# Altium PCB breath_led.PcbDoc
Units mil, origin at the board's own origin, x right, y up, seen from the top; angles counter-clockwise.
Board outline 1574.8 x 787.4 mil, 2 copper layers (Top Layer, Bottom Layer); 17 components, 25 nets, 73 pads, 11 vias.
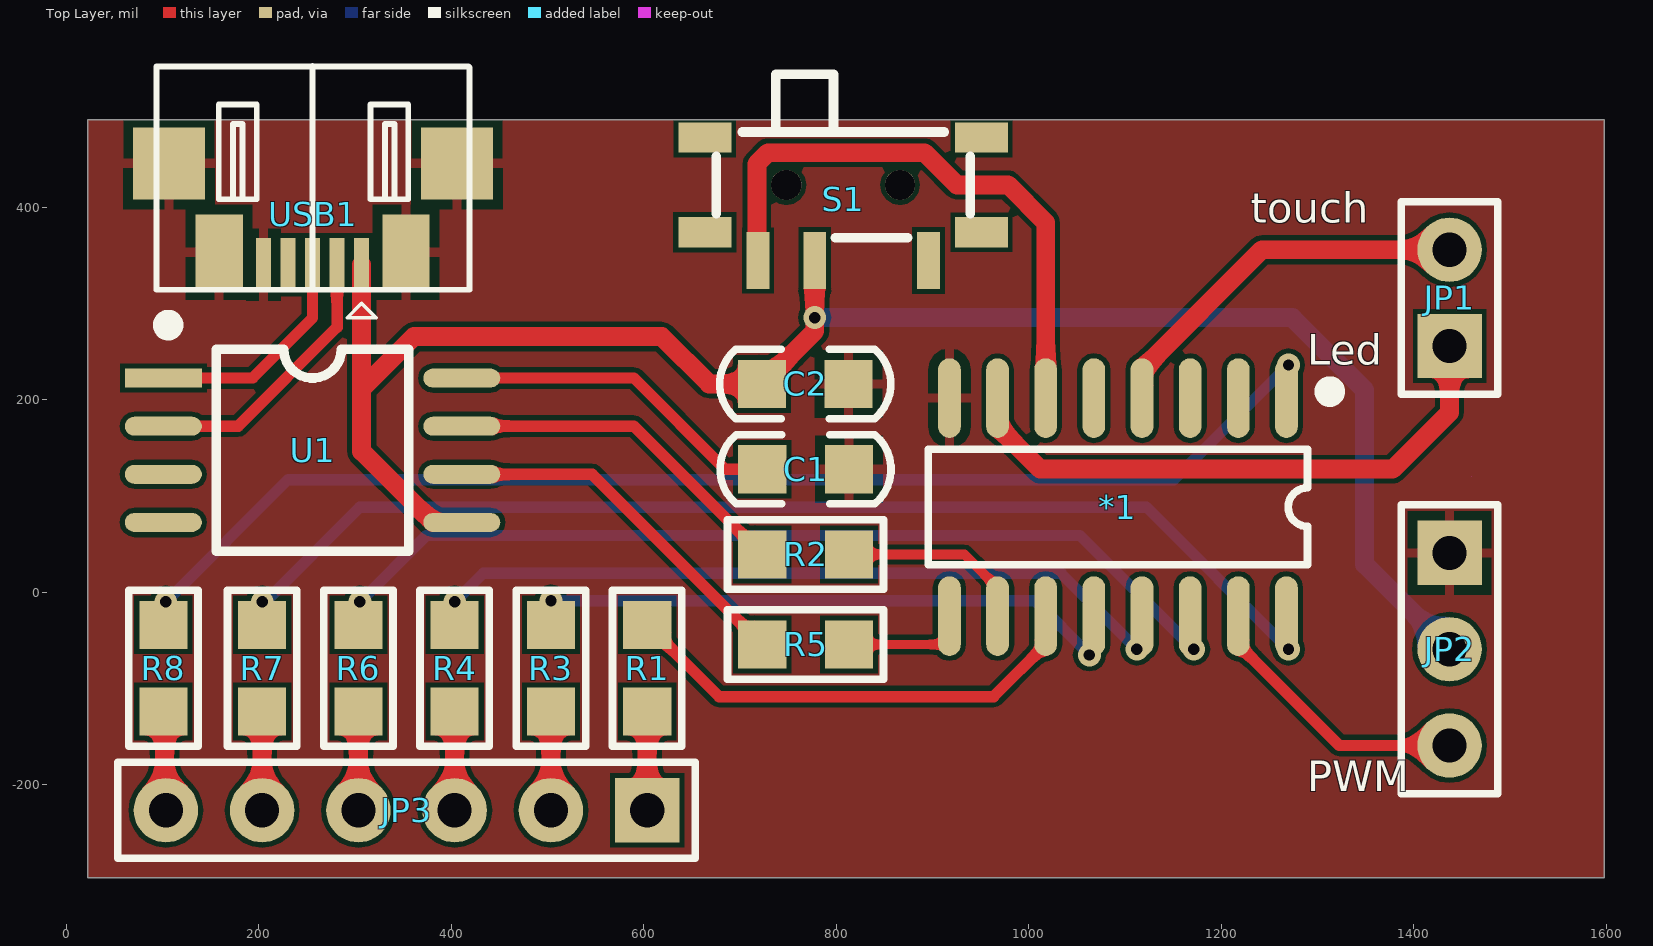
[diagram p0: Top Layer view]
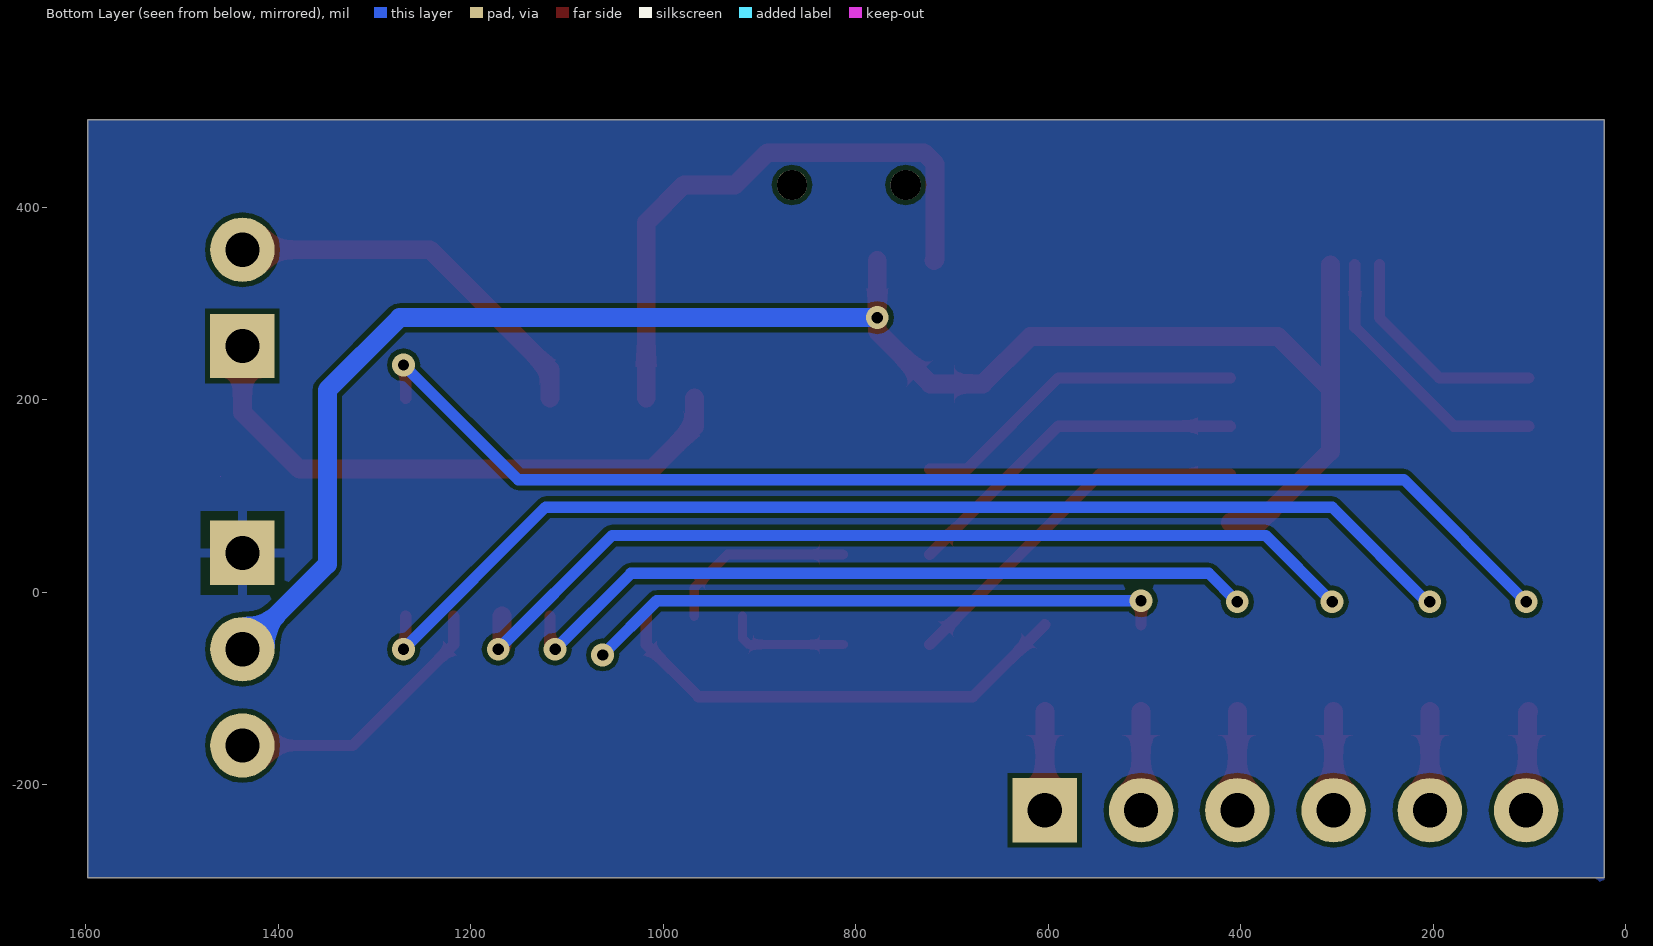
[diagram p1: Bottom Layer view, seen from below]

## Layer stack, top to bottom
Top Solder: solder mask 0.4, Solder Resist, Dk 3.5
Top Layer: signal copper 1.4
Dielectric 1: dielectric 12.6, FR-4, Dk 4.8
Bottom Layer: signal copper 1.4
Bottom Solder: solder mask 0.4, Solder Resist, Dk 3.5

## Board outline
22.64,-296.26 1597.44,-296.26 1597.44,491.14 22.64,491.14
cut-out: 1460,120

## Design rules (kind name [scope] priority, off if disabled: settings)
Clearance [All] p1: gap=5 ignorepadtopadclearanceinfootprint=FALSE except(0: Arc-Hole Track-Hole SMDPad-Hole THPad-Hole Via-Hole Fill-Hole Poly-Hole Region-Hole Text-Hole; 1: Text-Text; 7.87: Arc-Arc Arc-Track Track-Track)
HoleToHoleClearance [All] p1: gap=1 allowstackedmicrovias=TRUE
MinimumSolderMaskSliver [All] p1: minsoldermaskwidth=1
PolygonConnect [All] p1: connectstyle=Relief reliefconductorwidth=10 reliefentries=4 polygonreliefangle="90 Angle" airgapwidth=10
RoutingVias [All] p1: holewidth=11.81 width=23.62 viastyle="Through Hole" minholewidth=11.81 minwidth=23.62 maxholewidth=11.81 maxwidth=23.62
SilkToSilkClearance [All] p1: silktosilkclearance=0
SilkToSolderMaskClearance [IsPad] p1: minsilkscreentomaskgap=0 clearancetoexposedcopper=TRUE
SolderMaskExpansion [All] p1: expansion=4
Width [All] p1: maxlimit=393.7 minlimit=3.94 preferedwidth=9.65 bottomlayer_prefwidth=7.87 minimp=50.000000 maximp=50.000000 favimp=50.000000
26 further rules are at their usual default settings.

## Components (designator, comment, footprint, x,y, rotation, side; value= is the part's Value field where it differs from the comment)
*1 "STC15W408AS-SOP16" SOP16_M 1092.52,88.58 r270 top
C1 "104" "C 0805" 768.03,127.95 r0 top
C2 "104" "C 0805" 767.72,216.54 r180 top
JP1 "HDR-1X2" HDR-1X2 1437.01,255.91 r90 top
JP2 "HDR-1X3" HDR-1X3 1437.01,40.94 r270 top
JP3 "HDR-1X6" HDR-1X6 603.54,-226.38 r180 top
R1 "1K" "R 0805" 603.54,-78.74 r270 top
R2 "100R" "R 0805" 768.03,39.37 r0 top
R3 "1K" "R 0805" 503.54,-78.74 r270 top
R4 "1K" "R 0805" 403.54,-78.74 r270 top
R5 "100R" "R 0805" 768.03,-54.13 r0 top
R6 "1K" "R 0805" 303.54,-78.74 r270 top
R7 "1K" "R 0805" 203.54,-78.74 r270 top
R8 "1K" "R 0805" 100.9,-78.74 r270 top
S1 "SS-12F23" MSK-12C01-07 807.09,423.23 r180 top
U1 "CH340N" SOP8W_L 255.91,147.64 r0 top
USB1 "USB-5P" USB-MICRO_A 255.91,433.07 r180 top

## Footprints (in the part's own frame and the unit in brackets; to place one, negate y for a bottom-side part, rotate by r counter-clockwise, add the part's x,y. Pads: shape width x height; smd on the part's side, far side on the other; paste and mask are expansions set on the pad)
"C 0805" [mil] "无极性贴片电容"
  rect 50x50 smd: 1(-45,0) 2(45,0)
  silkscreen extent -89,-36 89,36, body extent -39,-24 39,24, height 20
HDR-1X2 [mm] "排针，2脚"
  rect 1.7x1.7 hole 0.9: 1(0,0)
  round 1.7 hole 0.9: 2(2.54,0)
  silkscreen extent -1.27,-1.27 3.81,1.27, body extent -1.27,-1.27 3.81,1.27, height 8.5
HDR-1X3 [mm] "排针，3脚"
  rect 1.7x1.7 hole 0.9: 1(0,0)
  round 1.7 hole 0.9: 2(2.54,0) 3(5.08,0)
  silkscreen extent -1.27,-1.27 6.35,1.27, body extent -1.27,-1.27 6.35,1.27, height 8.5
HDR-1X6 [mm] "排针，6脚"
  rect 1.7x1.7 hole 0.9: 1(0,0)
  round 1.7 hole 0.9: 2(2.54,0) 3(5.08,0) 4(7.62,0) 5(10.16,0) 6(12.7,0)
  silkscreen extent -1.27,-1.27 13.97,1.27, body extent -1.27,-1.27 13.97,1.27, height 8.5
MSK-12C01-07 [mm] "6.7*2.8*1.5mm(长宽高）"
  rect 1.4x0.8 smd: 0(-3.65,-1.25) 0(-3.65,1.25) 0(3.65,-1.25) 0(3.65,1.25)
  rect 0.6x1.5 smd: 1(-2.25,1.996) 2(0.75,1.996) 3(2.25,1.996)
  round 0.8 hole 0.8: " "(-1.5,0) " "(1.5,0)
  silkscreen extent -3.35,-2.92 3.35,1.4, body extent -3.92,-2.9 3.92,2.4, height 1.5
"R 0805" [mil] "1/8W贴片电阻"
  rect 50x50 smd: 1(-45,0) 2(45,0)
  silkscreen extent -81,-36 81,36, body extent -39,-25 39,25, height 20
SOP8W_L [mil] "5.3*8.3*1.8mm（长宽高）"
  rect 80x19.68 smd: 1(-155,75)
  oval 80x19.68 smd: 2(-155,25) 3(-155,-25) 4(-155,-75) 5(155,-75) 6(155,-25) 7(155,25) 8(155,75)
  silkscreen extent -156,-105 100,136, body extent -155,-104 155,104, height 75
SOP16_M [mm] "10.3*6.2*1.8mm（长宽高）"
  oval 2.1x0.6 smd: 1(-2.875,4.445) 2(-2.875,3.175) 3(-2.875,1.905) 4(-2.875,0.635) 5(-2.875,-0.635) 6(-2.875,-1.905) 7(-2.875,-3.175) 8(-2.875,-4.445) 9(2.875,-4.445) 10(2.875,-3.175) 11(2.875,-1.905) 12(2.875,-0.635) 13(2.875,0.635) 14(2.875,1.905) 15(2.875,3.175) 16(2.875,4.445)
  silkscreen extent -3.2,-5 1.52,5.74, body extent -3,-5 3,5, height 1.9
USB-MICRO_A [mm] "micro型USB ，5.9*8.2*2.5mm"
  rect 0.4x1.4 smd: 1(-1.296,2.355) 2(-0.648,2.355) 3(0,2.355) 4(0.648,2.355) 5(1.295,2.355)
  rect 1.9x1.9 smd: 5(-3.81,-0.312) 5(3.784,-0.312)
  rect 1.25x2 smd: 5(-2.464,2.025) 5(2.464,2.025)
  silkscreen extent -4.14,-2.89 4.11,3.75, body extent -3.98,-2.77 3.98,2.65, height 2.69

## Part data
*1: library part STC8F2K16S2-SOP16
C1 C2: library part C, "无极性贴片电容"
JP1: library part "Header 2", "2P接插件", BOM名称=2P, 学习资源=https://lmdzstyle.taoba
JP2: library part "Header 3", "3P接插件", BOM名称=3P, 学习资源=https://lmdzstyle.taoba
JP3: library part "Header 6", "6P接插件", BOM名称=6, 学习资源=https://lmdzstyle.ta
R1 R2 R3 R4 R5 R6 R7 R8: library part R, "贴片电阻"
S1: library part SSW-1P, "1路波动开关", BOM名称=², 学习资源=https://lmdzstyle.taoba
U1: library part SOP20
USB1: "微型USB母座", BOM名称=Î¢Ð, 学习资源=https://lmdzstyle.taoba

## Via types
v1: diameter 23.62, hole 11.81, Top Layer to Bottom Layer, 11 vias

## Nets (pads, with @x,y where several pads share a name; then routed paths per layer and width w, separated by ;. In a path a pad name is that pad's centre, name@x,y a point inside that pad or via, vN(x,y) a via of type N, cw(c..) or ccw(c..) an arc to the next point about the centre after c; other vN are vias at no path point)
GND: *1.8 C1.2 C2.1 JP2.1 USB1.5
L1: *1.11 R1.1 | length 496.8
  Top Layer w11.81: R1.1 678.07,-108.27 963.39,-108.27 1017.52,-54.13 *1.11
L2: *1.12 R3.1 | length 607.6
  Top Layer w11.81: R3.1 v1(503.54,-8.74)
  Bottom Layer w11.81: v1(503.54,-8.74) 1006.62,-8.74 v1(1062.87,-64.99)
L3: *1.13 R4.1 | length 790.2
  Top Layer w11.81: v1(1112.2,-59.06) 1117.52,-53.74 *1.13
  Bottom Layer w11.81: v1(403.54,-9.84) 433.07,19.68 1033.46,19.68 v1(1112.2,-59.06)
L4: *1.14 R6.1 | length 979.6
  Top Layer w19.68: *1.14 1167.52,-54.72 1171.26,-58.46 v1(1171.26,-59.06)
  Bottom Layer w11.81: v1(305.12,-9.84) 374.02,59.06 1053.15,59.06 v1(1171.26,-59.06)
L5: *1.16 R7.1 | length 1203.4
  Top Layer w11.81: *1.16 1267.52,-56.89 v1(1269.69,-59.06)
  Bottom Layer w11.81: v1(203.54,-9.84) 206.69,-9.84 305.12,88.58 1122.05,88.58 v1(1269.69,-59.06)
L6: *1.1 R8.1 | length 1303.4
  Top Layer w11.81: *1.1 1267.52,234.06 v1(1269.69,236.22)
  Bottom Layer w11.81: v1(103.54,-9.84) 230.54,117.15 1150.61,117.15 v1(1269.69,236.22)
Led: *1.7 JP1.1 | length 610.7
  Top Layer w19.68: *1.7 967.52,172.24 1011.81,127.95 1377.95,127.95 1437.01,187.01 JP1.1
Net*1_6: *1.6 S1.3 | length 618.2
  Top Layer w19.68: S1.3 717.44,345.71 717.44,445.16 728.97,456.69 891.67,456.69 925.13,423.23 978.35,423.23 1017.52,384.06 *1.6
NetC1_1: C1.1 U1.8 | length 351.3
  Top Layer w11.81: U1.8 589.77,222.63 684.45,127.95 C1.1
NetJP3_1: JP3.1 R1.2 | length 102.6
  Top Layer w19.68: JP3.1 R1.2
NetJP3_2: JP3.2 R3.2 | length 102.6
  Top Layer w19.68: JP3.2 R3.2
NetJP3_3: JP3.3 R4.2 | length 102.6
  Top Layer w19.68: JP3.3 R4.2
NetJP3_4: JP3.4 R6.2 | length 102.6
  Top Layer w19.68: JP3.4 R6.2
NetJP3_5: JP3.5 R7.2 | length 102.6
  Top Layer w19.68: JP3.5 R7.2
NetJP3_6: JP3.6 R8.2 | length 103.7
  Top Layer w19.68: R8.2 102.22,-125.06 102.22,-225.06 JP3.6
NetR2_1: R2.1 U1.7 | length 367.3
  Top Layer w11.81: U1.7 589.77,172.63 R2.1
NetR5_1: R5.1 U1.6 | length 385.3
  Top Layer w11.81: U1.6 546.26,122.63 R5.1
NetU1_1: U1.1 USB1.3 | length 236.2
  Top Layer w11.81: U1.1 193.59,222.63 255.91,284.95 USB1.3
NetU1_2: U1.2 USB1.2 | length 288
  Top Layer w11.81: U1.2 178.54,172.63 281.41,275.5 USB1.2
PWM: *1.15 JP2.3 | length 292.5
  Top Layer w11.81: *1.15 1217.52,-54.13 1322.44,-159.06 JP2.3
RXD: *1.10 R2.2 | length 198.3
  Top Layer w10: R2.2 933.07,39.37 967.52,4.92 *1.10
Touch: *1.4 JP1.2 | length 400.6
  Top Layer w19.68: *1.4 1117.52,231.3 1242.13,355.91 JP1.2
TXD: *1.9 R5.2 | length 130.2
  Top Layer w9.65: R5.2 911.06,-54.13 917.52,-47.68 *1.9
VCC: C2.2 JP2.2 S1.2 U1.5 USB1.1 | length 1845.6
  Top Layer w19.68: USB1.1 306.91,212.79 ; U1.5 380.74,72.63 306.91,146.47 306.91,212.79 ; S1.2 v1(777.56,285.43) 777.56,271.38 C2.2 667.86,216.54 618.64,265.75 361.2,265.75 308.25,212.79 306.91,212.79
  Bottom Layer w19.68: v1(777.56,285.43) 1273.62,285.43 1348.83,210.23 1348.83,29.13 JP2.2
pads on no net: "S1. " *1.2 *1.3 *1.5 S1.0 S1.1 U1.3 U1.4 USB1.4

## Polygon pours and split planes (outlines as drawn)
GND on Top Layer (solid, pour order 112): 22.64,-296.26 1597.44,-296.26 1597.44,491.14 22.64,491.14
GND on Top Layer "Top Layer-GND 1" (solid, pour order 76): 22.64,-296.26
no net on Top Layer "NONET_L01_P026" (solid, pour order 26): -130,-250
no net on Top Layer "NONET_L01_P020" (solid, pour order 20): 1225,-640
no net on Top Layer "NONET_L01_P000" (solid, pour order 0): -275,-100
GND on Bottom Layer (solid, pour order 114): 22.64,-305.12 31.5,-296.26 1597.44,-296.26 1597.44,491.14 22.64,491.14
VCC on Bottom Layer "Bottom Layer-VCC 1" (solid, pour order 82): 22.64,-296.26
VCC on Bottom Layer "Bottom Layer-VCC 2" (solid, pour order 80): 118.11,-226.38
no net on Bottom Layer "Bottom Layer-No Net" (solid, pour order 72): 669.29,147.64
no net on Bottom Layer "NONET_L02_P060" (solid, pour order 60): 655,-685
no net on Bottom Layer "NONET_L02_P050" (solid, pour order 50): 60.54,-730
no net on Bottom Layer "NONET_L02_P046" (solid, pour order 46): 65.56,-204.99

## Silkscreen, mask and mechanical layers (free items; w line width, h text height)
Top Overlay:
  text "touch" at 1230.31,383.86 h31.5
  text "Led" at 1289.37,236.22 h31.5
  text "PWM" at 1289.37,-206.69 h31.5
Mechanical 1:
  lines w19.68: 22.64,-305.12 1597.44,-305.12 1597.44,491.14 22.64,491.14 22.64,-305.12